# Altium PCB SolarCharger.PcbDoc
Units mm, origin at the board's own origin, x right, y up, seen from the top; angles counter-clockwise.
Board outline 72 x 45 mm, 2 copper layers (Top Layer, Bottom Layer); 84 components, 32 nets, 239 pads, 515 vias.
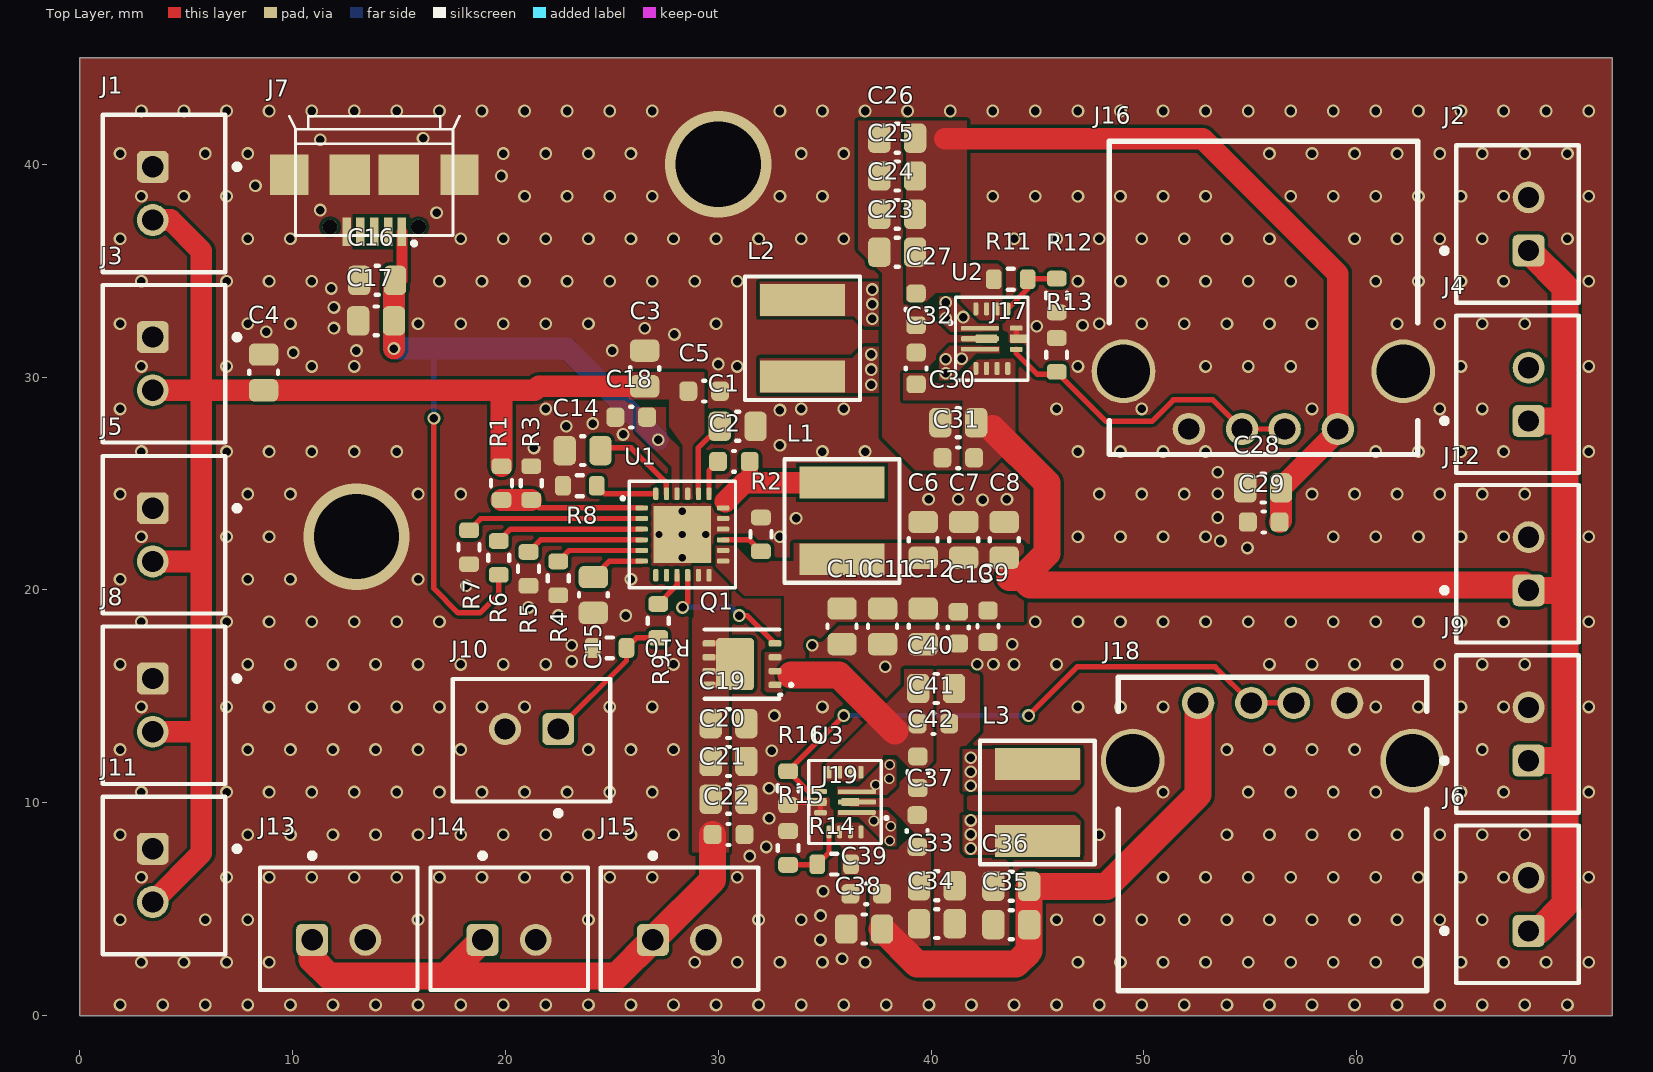
[diagram p0: Top Layer view]
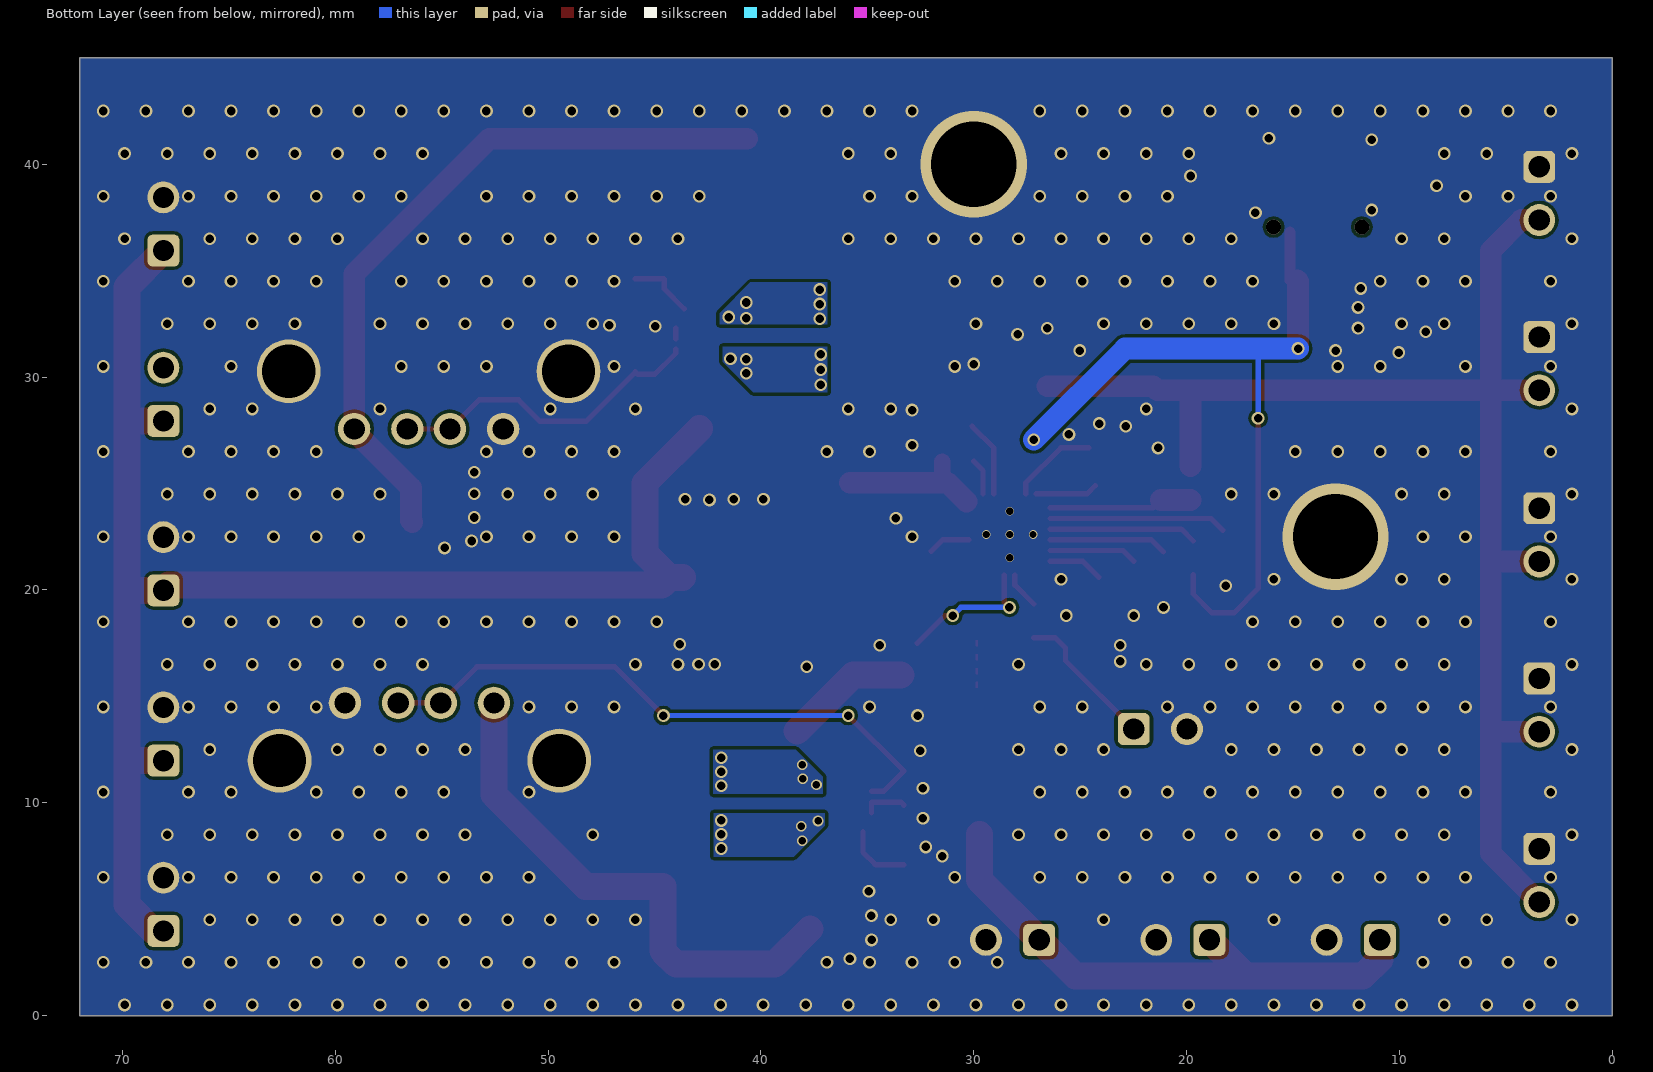
[diagram p1: Bottom Layer view, seen from below]
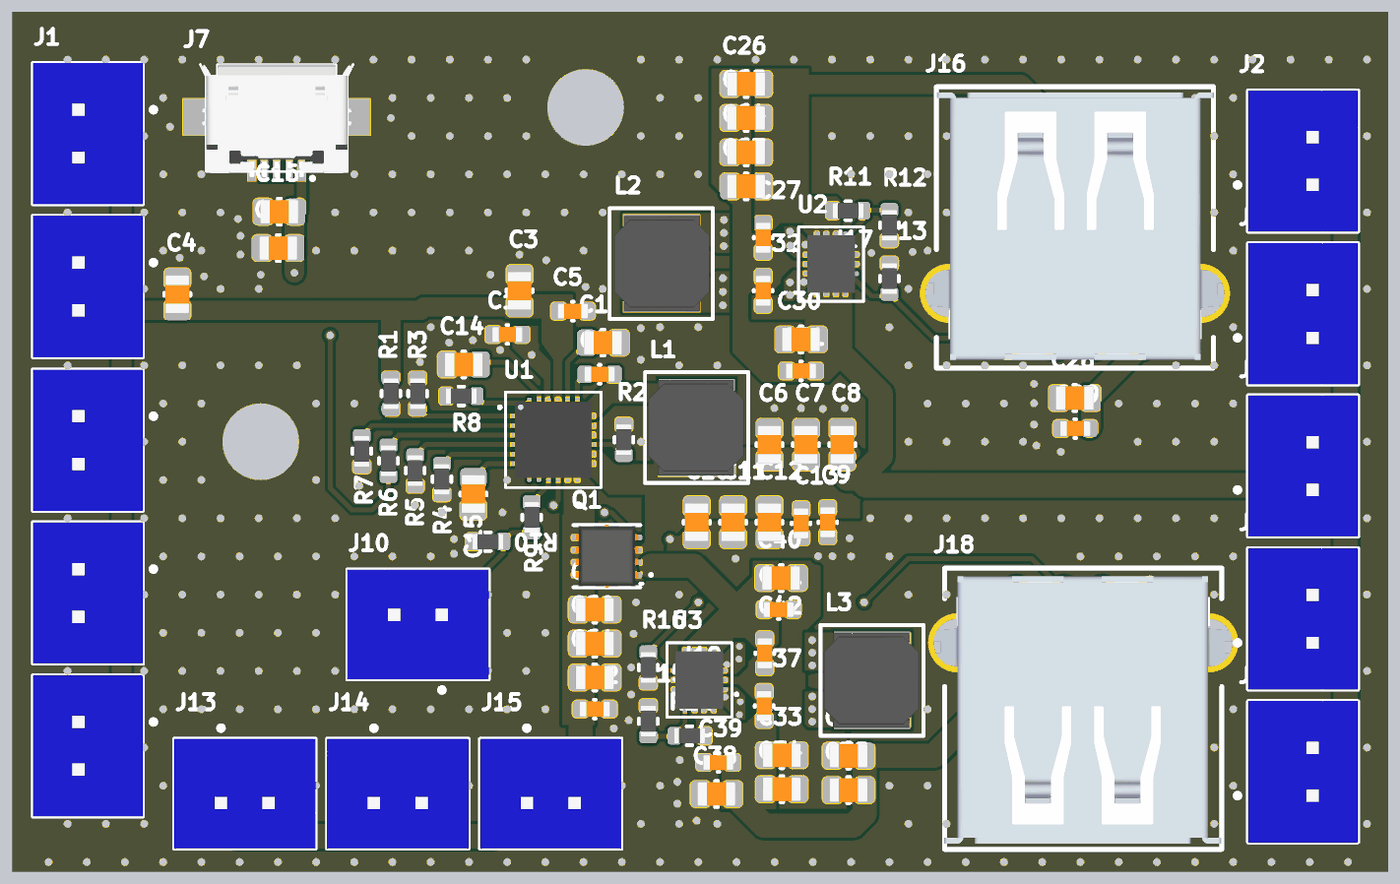
[diagram p2: 3D render of the assembled board from above, using the file's embedded part models]

## Layer stack, top to bottom
Top Solder: solder mask 0.0102, Solder Resist, Dk 3.5
Top Layer: signal copper 0.0356
Dielectric 1: dielectric 0.32, FR-4, Dk 4.8
Bottom Layer: signal copper 0.0356
Bottom Solder: solder mask 0.0102, Solder Resist, Dk 3.5

## Board outline
0,0 72,0 72,45 0,45

## Design rules (kind name [scope] priority, off if disabled: settings)
Clearance [All] p1: gap=0.15 ignorepadtopadclearanceinfootprint=FALSE except(0: Arc-Hole Track-Hole SMDPad-Hole THPad-Hole Via-Hole Fill-Hole Poly-Hole Region-Hole Text-Hole)
HoleSize [All] p1: absolutevalues=TRUE maxlimit=6.3 minlimit=0.2 maxpercent=80.000 minpercent=20.000
MinimumSolderMaskSliver [All] p1: minsoldermaskwidth=0.15
PlaneConnect [All] p1: planeconnectstyle=Direct reliefexpansion=0.508 reliefentries=4 reliefconductorwidth=0.254 reliefairgap=0.254
PolygonConnect [All] p1: connectstyle=Direct reliefconductorwidth=0.254 reliefentries=4 polygonreliefangle="90 Angle" airgapwidth=0.254
RoutingVias [All] p1: holewidth=0.6 width=0.35 viastyle="Through Hole" minholewidth=0.35 minwidth=0.3 maxholewidth=1.7 maxwidth=1.5
SilkToSilkClearance [All] p1: silktosilkclearance=0.15
SilkToSolderMaskClearance [IsPad] p1: minsilkscreentomaskgap=0.08 clearancetoexposedcopper=TRUE
SolderMaskExpansion [All] p1: expansion=0.045
Width [All] p1: maxlimit=1.524 minlimit=0.203 preferedwidth=0.254 minimp=50.000000 maximp=50.000000 favimp=50.000000
25 further rules are at their usual default settings.

## Classes and differential pairs
component class SolarCharger: C1 C2 C3 C4 C5 C6 C7 C8 C9 C14 C15 C16 C17 C18 C19 C20 C21 C22 C23 C24 C25 C26 C27 C28 C29 C30 C31 C32 C33 C34 C35 C36 C37 C38 C39 C40 J1 J2 J3 J4 J5 J6 J7 J8 J9 J10 J11 J12 J13 J14 J15 J16 J17 J18 J19 L1 L2 L3 Q1 R1 R2 R3 R4 R5 R6 R7 R8 R9 R10 R11 R12 R13 R14 R15 R16 U1 U2 U3

## Components (designator, comment, footprint, x,y, rotation, side; value= is the part's Value field where it differs from the comment)
C1 "4.7u" C0805_N 30.91,27.686 r180 top
C2 "10n" C0603_N 30.734,26.035 r0 top
C3 "10u" C0805_N 26.543,30.402 r90 top
C4 "10u" C0805_N 8.636,30.217 r90 top
C5 "100n" C0603_N 29.337,29.337 r0 top
C6 "10u" C0805_N 39.624,22.352 r90 top
C7 "10u" C0805_N 41.529,22.352 r90 top
C8 "10u" C0805_N 43.434,22.352 r90 top
C9 "100n" C0603_N 42.672,18.288 r270 top
C10 "10u" C0805_N 35.814,18.288 r270 top
C11 "10u" C0805_N 37.719,18.288 r270 top
C12 "10u" C0805_N 39.624,18.288 r270 top
C13 "100n" C0603_N 41.275,18.23 r270 top
C14 "4.7u" C0805_N 23.622,26.543 r0 top
C15 "4.7u" C0805_N 24.13,19.763 r270 top
C16 "10u" C0805_N 13.97,34.544 r180 top
C17 "10u" C0805_N 13.921,32.639 r180 top
C18 "100n" C0603_N 25.908,28.117 r180 top
C19 "10u" C0805_N 30.48,13.716 r0 top
C20 "10u" C0805_N 30.48,11.938 r0 top
C21 "10u" C0805_N 30.48,10.16 r0 top
C22 "100n" C0603_N 30.48,8.509 r0 top
C23 "10u" C0805_N 38.405,35.865 r180 top
C24 "10u" C0805_N 38.405,37.643 r180 top
C25 "10u" C0805_N 38.405,39.446 r180 top
C26 "10u" C0805_N 38.407,41.224 r180 top
C27 "100n" C0603_N 39.294,33.181 r270 top
C28 "10u" C0805_N 55.601,24.79 r180 top
C29 "100n" C0603_N 55.626,23.19 r180 top
C30 "CAP" C0805_N 41.275,27.856 r180 top
C31 "CAP" C0603_N 41.275,26.205 r180 top
C32 "CAP" C0603_N 39.294,30.404 r90 top
C33 "10u" C0805_N 40.267,6.096 r0 top
C34 "10u" C0805_N 40.267,4.318 r0 top
C35 "10u" C0805_N 43.764,4.267 r180 top
C36 "10u" C0805_N 43.764,6.071 r180 top
C37 "100n" C0603_N 39.345,8.669 r90 top
C38 "10u" C0805_N 36.854,4.064 r180 top
C39 "100n" C0603_N 36.949,5.715 r180 top
C40 "CAP" C0805_N 40.234,15.367 r0 top
C41 "CAP" C0603_N 40.107,13.716 r0 top
C42 "CAP" C0603_N 39.378,11.43 r270 top
J1 "=Value" B2B-XH-A 3.429,39.878 r270 top
J2 "=Value" B2B-XH-A 68.072,35.941 r90 top
J3 "=Value" B2B-XH-A 3.429,31.877 r270 top
J4 "=Value" B2B-XH-A 68.072,27.94 r90 top
J5 "=Value" B2B-XH-A 3.429,23.836 r270 top
J6 "=Value" B2B-XH-A 68.072,3.977 r90 top
J7 "USB_OTG" WR-COM-629105136821 12.686,39.497 r180 top
J8 "=Value" B2B-XH-A 3.429,15.835 r270 top
J9 "=Value" B2B-XH-A 68.072,11.978 r90 top
J10 "=Value" B2B-XH-A 22.479,13.462 r180 top
J11 "=Value" B2B-XH-A 3.429,7.834 r270 top
J12 "=Value" B2B-XH-A 68.072,19.979 r90 top
J13 "=Value" B2B-XH-A 10.918,3.556 r0 top
J14 "=Value" B2B-XH-A 18.923,3.556 r0 top
J15 "=Value" B2B-XH-A 26.924,3.556 r0 top
J16 "USB" USB_TYPE_A_SOCK 55.61,27.559 r180 top
J17 "2 way net tie junction" 2way_MP#1 43.358,31.801 r180 top net-tie
J18 "USB" USB_TYPE_A_SOCK 56.041,14.688 r0 top
J19 "2 way net tie junction" 2way_MP#2 35.441,10.033 r0 top net-tie
L1 "2u2" SNR5040 35.814,23.241 r270 top
L2 "IND" SNR5040 33.96,31.826 r90 top
L3 "IND" SNR5040 44.991,10.011 r270 top
Q1 "CSD25402" DNH8 31.115,16.51 r90 top
R1 "RES" R0603_N 19.812,25.019 r270 top
R2 "RES" R0603_N 32.004,22.606 r270 top
R3 "RES" R0603_N 21.209,25.019 r90 top
R4 "RES" R0603_N 22.479,20.541 r270 top
R5 "RES" R0603_N 21.082,20.988 r270 top
R6 "RES" R0603_N 19.685,21.502 r270 top
R7 "RES" R0603_N 18.288,22.004 r270 top
R8 "RES" R0603_N 23.495,24.892 r180 top
R9 "RES" R0603_N 27.178,18.542 r270 top
R10 "RES" R0603_N 24.892,17.272 r180 top
R11 "RES" R0603_N 43.739,34.595 r0 top
R12 "RES" R0603_N 45.898,33.833 r270 top
R13 "100k" R0603_N 45.898,31.039 r90 top
R14 "RES" R0603_N 35.441,7.112 r180 top
R15 "RES" R0603_N 33.282,7.874 r90 top
R16 "100k" R0603_N 33.282,10.685 r270 top
U1 "BQ24166" VQFN-24 28.313,22.602 r0 top
U2 "TPS630250" VQFN-HR-14 42.85,31.801 r0 top
U3 "TPS630250" VQFN-HR-14 35.953,10.03 r180 top

## Footprints (in the part's own frame and the unit in brackets; to place one, negate y for a bottom-side part, rotate by r counter-clockwise, add the part's x,y. Pads: shape width x height; smd on the part's side, far side on the other; paste and mask are expansions set on the pad)
2way_MP#1 [mil] "2 way medium power net tie junction"
  rrect5% 32x15 smd paste-100: 1(-30,0)
  rrect5% 39.37x15 smd paste-100: 2(30,0)
2way_MP#2 [mil] "2 way medium power net tie junction"
  rrect5% 32x15 smd paste-100: 1(-30,0) 2(30,0)
B2B-XH-A [mm] "Header, Vertical, 2.50 mm pitch; 0.70 mm lead width, 5 pins, 1 row, 5 pins per row, 14.90 mm L X 5.75 mm W X 7.00 mm H body"
  rrect33% 1.5x1.5 / inner round 1.5 / far side rrect33% 1.5x1.5 hole 1 paste-1.5: 1(0,0)
  round 1.5 hole 1 paste-1.5: 2(2.5,0)
  silkscreen extent -2.45,-2.35 4.95,4.08, body extent -2.45,-2.35 4.95,3.4, height 7.05
C0603_N [mm] "Capacitor, Chip; 1.60 mm L X 0.80 mm W X 0.87 mm H body"
  rrect50% 0.84x0.91 smd: 1(-0.745,0) 2(0.745,0)
  silkscreen extent -0.05,-0.49 0.05,0.49, body extent -0.8,-0.4 0.8,0.4, height 0.87
C0805_N [mm] "Capacitor, Chip; 2.00 mm L X 1.25 mm W X 1.35 mm H body"
  rrect48% 1.05x1.38 smd: 1(-0.84,0) 2(0.84,0)
  silkscreen extent -0.08,-0.68 0.08,0.68, body extent -1,-0.63 1,0.63, height 1.35
DNH8 [mm] "Small Outline No-Lead (SON with Tab), 0.65 mm pitch; 8 pin, 3.15 mm L X 3.30 mm W X 0.90 mm H body"
  rrect50% 0.3x0.6 smd: D(-0.975,-1.55) D(-0.325,-1.55) D(0.325,-1.55) G(0.975,-1.55) S(-0.975,1.55) S(-0.325,1.55) S(0.325,1.55) S(0.975,1.55)
  rrect18% 2.45x1.775 smd paste-2.45: S(0,0.33)
  Top Layer region: 0.825,1.2 1.125,1.2 1.125,1.325 0.825,1.325
  Top Layer region: 0.175,1.2 0.475,1.2 0.475,1.325 0.175,1.325
  Top Layer region: -0.475,1.2 -0.175,1.2 -0.175,1.325 -0.475,1.325
  Top Layer region: -1.125,1.2 -0.825,1.2 -0.825,1.325 -1.125,1.325
  silkscreen extent -1.63,-2.39 1.63,1.75, body extent -1.66,-1.65 1.65,1.65, height 0.9
R0603_N [mm] "Resistor, Chip; 1.60 mm L X 0.80 mm W X 0.55 mm H body"
  rrect51% 0.74x0.93 smd: 1(-0.795,0) 2(0.795,0)
  silkscreen extent -0.15,-0.49 0.15,0.49, body extent -0.8,-0.4 0.8,0.4, height 0.55
SNR5040 [mm] "2-Leads, Body 5.00x5.00mm"
  rect 1.5x4 smd: 1(-1.8,0) 2(1.8,0)
  silkscreen extent -2.9,-2.7 2.9,2.7, body extent -2.5,-2.54 2.5,2.46, height 4
USB_TYPE_A_SOCK [mm] "Usb type A socket, THT"
  round 1.524 hole 1: D_N(-1,0) D_P(1,0) GND(3.5,0) VBUS(-3.5,0)
  round 3 hole 2.5: S(-6.57,-2.71) S(6.57,-2.71)
  silkscreen extent -7.25,-13.52 7.25,1.2, body extent -8.02,-13.22 7.97,0.78, height 7.63
VQFN-24 [mm] "VQFN 24 pin, 4 mm L X 4 mm W X 1 mm H body"
  rrect50% 0.58x0.24 smd mask+0.07: 1(-1.913,1.25) 2(-1.913,0.75) 3(-1.913,0.25) 4(-1.913,-0.25) 5(-1.913,-0.75) 6(-1.913,-1.25) 13(1.913,-1.25) 14(1.913,-0.75) 15(1.913,-0.25) 16(1.913,0.25) 17(1.913,0.75) 18(1.913,1.25)
  rrect50% 0.24x0.58 smd mask+0.07: 7(-1.25,-1.913) 8(-0.75,-1.913) 9(-0.25,-1.913) 10(0.25,-1.913) 11(0.75,-1.913) 12(1.25,-1.913) 19(1.25,1.913) 20(0.75,1.913) 21(0.25,1.913) 22(-0.25,1.913) 23(-0.75,1.913) 24(-1.25,1.913)
  rect 2.7x2.7 smd mask+0.07: TH(0,0)
  silkscreen extent -2.87,-2.5 2.5,2.5, body extent -2.05,-2.05 6.2,2.05, height 1
VQFN-HR-14 [mm] "VQFN 14 pin, 3.1 mm L X 2.6 mm W X 0.90 mm H body"
  rrect50% 1.79x0.22 smd mask+0.05: 1(-0.555,0.49) 3(-0.555,-0.49)
  rrect50% 1.79x0.24 smd mask+0.05: 2(-0.555,0)
  rrect50% 0.24x0.6 smd mask+0.05: 4(-0.75,-1.4) 5(-0.25,-1.4) 6(0.25,-1.4) 7(0.75,-1.4) 11(0.75,1.4) 12(0.25,1.4) 13(-0.25,1.4) 14(-0.75,1.4)
  rrect50% 0.6x0.24 smd mask+0.05: 8(1.15,-0.5) 9(1.15,0) 10(1.15,0.5)
  silkscreen extent -2.02,-1.95 1.7,1.95, body extent -1.25,-1.5 1.25,1.5, height 1
WR-COM-629105136821 [mm] "5 pins"
  rect 0.4x1.35 smd: D_N(-1.8,2.675) D_P(-1.15,2.675) GND(0.15,2.675) ID(-0.5,2.675) VBUS(-2.45,2.675)
  rect 1.8x1.9 smd: S(-5.15,0) S(2.85,0)
  rect 1.9x1.9 smd: S(-2.3,0) S(0,0)
  round 0.7 hole 0.7 unplated: ""(-3.225,2.45) ""(0.925,2.45)
  silkscreen extent -5.15,-2.75 2.85,3.27, body extent -5.15,-2.76 2.85,3.15, height 2.69

## Part data
C1 C2 C3 C4 C5 C6 C7 C8 C9 C10 C11 C12 C13 C14 C15 C16 C17 C18 C19 C20 C21 C22 C23 C24 C25 C26 C27 C28 C29 C33 C34 C35 C36 C37 C38 C39: library part CAP, RevS="$Rev:: 58        $"
J1 J2 J3 J4 J5 J6 J8 J9 J10 J11 J12 J13 J14 J15: library part PINHDR_2X1, "Socket", ComponentLink1Description=Manufacturer, ComponentLink1URL=http://www.we-online.de, ComponentLink2Description=Datasheet, ComponentLink2URL=http://katalog.we-online.de/em/datasheet/691412320002.pdf
J7 J16 J18: "USB Connector, With Pegs, Micro USB Type B, USB 2.0, Receptacle, 5 Ways, Surface Mount, Right Angle"
J17 J19: library part NetTie_2, ComponentLink1Description=Source, ComponentLink1URL=http://www.edatools.cz/addons, FootprintNote="LP=12mil, MP=40mil, HP=120mil"
L1: library part IND, "Inductor"
L2 L3: "Inductor"
Q1: library part MOSFET_P
R13 R16: library part RES
U1: "2.5A, Dual-Input, Single Cell Switch Mode Li-Ion Battery Charger with Power Path / Management"
U2 U3: library part TPS63025, "High Current, High Efficiency Single Inductor Buck-Boost Converter"
C30 C31 C32 C40 C41 C42: RevS="$Rev:: 58        $"

## Via types
v1: diameter 0.6, hole 0.4, Top Layer to Bottom Layer, tented both sides, 502 vias
v2: diameter 0.5, hole 0.35, Top Layer to Bottom Layer, tented both sides, 6 vias
v3: diameter 0.4, hole 0.35, Top Layer to Bottom Layer, tented both sides, 5 vias
v4: diameter 5, hole 4, Top Layer to Bottom Layer, tented both sides, 2 vias

## Nets (pads, with @x,y where several pads share a name; then routed paths per layer and width w, separated by ;. In a path a pad name is that pad's centre, name@x,y a point inside that pad or via, vN(x,y) a via of type N, cw(c..) or ccw(c..) an arc to the next point about the centre after c; other vN are vias at no path point)
GND: C1.1 C3.2 C4.2 C5.2 C6.2 C7.2 C8.2 C9.2 C10.2 C11.2 C12.2 C13.2 C14.1 C15.2 C16.2 C17.2 C18.2 C19.2 C20.2 C21.2 C22.2 C28.2 C29.2 C38.2 C39.2 J1.1 J2.2 J3.1 J5.1 J6.2 J7.GND J7.S J8.1 J9.2 J10.2 J11.1 J12.2 J13.2 J14.2 J15.2 J16.GND J16.S J17.1 J18.GND J18.S J19.1 R2.1 R3.2 R4.2 R5.2 R7.2 R8.2 R10.2 R12.2 R13.2 R15.2 R16.2 U1.16 U1.17 U1.TH U2.9 U2.10 U3.9 U3.10 | length 2.6
  Top Layer w0.254: R16.2 33.422,10.03 U3.9 U3.10 ; U2.9 U2.10
  other v1: 1.895,0.5 3.895,0.5 5.895,0.5 7.895,0.5 9.895,0.5 11.895,0.5 13.895,0.5 15.895,0.5 17.895,0.5 19.895,0.5 21.895,0.5 23.895,0.5 25.895,0.5 27.895,0.5 29.895,0.5 31.895,0.5 33.895,0.5 35.895,0.5 37.895,0.5 39.895,0.5 41.895,0.5 43.895,0.5 45.895,0.5 47.895,0.5 49.895,0.5 51.895,0.5 53.895,0.5 55.895,0.5 57.895,0.5 59.895,0.5 61.895,0.5 63.895,0.5 65.895,0.5 67.895,0.5 69.895,0.5 2.895,2.5 4.895,2.5 6.895,2.5 8.895,2.5 28.895,2.5 30.895,2.5 32.895,2.5 34.895,2.5 36.895,2.5 46.895,2.5 48.895,2.5 50.895,2.5 52.895,2.5 54.895,2.5 56.895,2.5 58.895,2.5 60.895,2.5 62.895,2.5 64.895,2.5 66.895,2.5 68.895,2.5 70.895,2.5 35.814,2.667 34.798,3.556 1.895,4.5 5.895,4.5 7.895,4.5 15.895,4.5 23.895,4.5 31.895,4.5 33.895,4.5 45.895,4.5 47.895,4.5 49.895,4.5 51.895,4.5 53.895,4.5 55.895,4.5 57.895,4.5 59.895,4.5 61.895,4.5 63.895,4.5 65.895,4.5 34.803,4.699 34.925,5.842 2.895,6.5 6.895,6.5 8.895,6.5 10.895,6.5 12.895,6.5 14.895,6.5 16.895,6.5 18.895,6.5 20.895,6.5 22.895,6.5 24.895,6.5 26.895,6.5 30.895,6.5 50.895,6.5 52.895,6.5 54.895,6.5 56.895,6.5 58.895,6.5 60.895,6.5 62.895,6.5 64.895,6.5 66.895,6.5 70.895,6.5 31.479,7.493 32.258,7.924 1.895,8.5 7.895,8.5 9.895,8.5 11.895,8.5 13.895,8.5 15.895,8.5 17.895,8.5 19.895,8.5 21.895,8.5 23.895,8.5 25.895,8.5 27.895,8.5 47.895,8.5 53.895,8.5 55.895,8.5 57.895,8.5 59.895,8.5 61.895,8.5 63.895,8.5 65.895,8.5 67.895,8.5 32.385,9.271 2.895,10.5 6.895,10.5 8.895,10.5 10.895,10.5 12.895,10.5 14.895,10.5 16.895,10.5 18.895,10.5 20.895,10.5 22.895,10.5 24.895,10.5 26.895,10.5 50.895,10.5 54.895,10.5 56.895,10.5 58.895,10.5 60.895,10.5 64.895,10.5 66.895,10.5 70.895,10.5 32.385,10.685 32.512,12.446 1.895,12.5 7.895,12.5 9.895,12.5 11.895,12.5 13.895,12.5 15.895,12.5 17.895,12.5 23.895,12.5 25.895,12.5 27.895,12.5 53.895,12.5 55.895,12.5 57.895,12.5 59.895,12.5 65.895,12.5 32.639,14.097 2.895,14.5 6.895,14.5 8.895,14.5 10.895,14.5 12.895,14.5 14.895,14.5 16.895,14.5 18.895,14.5 20.895,14.5 24.895,14.5 26.895,14.5 34.895,14.5 46.895,14.5 48.895,14.5 50.895,14.5 60.895,14.5 62.895,14.5 64.895,14.5 66.895,14.5 70.895,14.5 37.846,16.383 1.895,16.5 7.895,16.5 9.895,16.5 11.895,16.5 13.895,16.5 15.895,16.5 17.895,16.5 19.895,16.5 21.895,16.5 27.895,16.5 42.164,16.51 42.924,16.51 43.895,16.5 45.895,16.5 55.895,16.5 57.895,16.5 59.895,16.5 61.895,16.5 63.895,16.5 65.895,16.5 67.895,16.5 23.114,16.637 23.114,17.399 34.417,17.399 43.815,17.448 2.895,18.5 6.895,18.5 8.895,18.5 10.895,18.5 12.895,18.5 14.895,18.5 16.895,18.5 44.895,18.5 46.895,18.5 48.895,18.5 50.895,18.5 52.895,18.5 54.895,18.5 56.895,18.5 58.895,18.5 60.895,18.5 62.895,18.5 64.895,18.5 66.895,18.5 70.895,18.5 22.479,18.796 25.654,18.796 21.082,19.177 18.161,20.193 1.895,20.5 7.895,20.5 9.895,20.5 15.895,20.5 25.895,20.5 54.864,21.971 53.594,22.297 2.895,22.5 6.895,22.5 8.895,22.5 32.895,22.5 46.895,22.5 48.895,22.5 50.895,22.5 52.895,22.5 58.895,22.5 60.895,22.5 62.895,22.5 64.895,22.5 66.895,22.5 70.895,22.5 33.655,23.368 53.467,23.401 42.418,24.224 39.878,24.257 41.275,24.257 43.561,24.257 1.895,24.5 7.895,24.5 9.895,24.5 15.895,24.5 17.895,24.5 47.895,24.5 49.895,24.5 51.895,24.5 53.467,24.515 57.895,24.5 59.895,24.5 61.895,24.5 63.895,24.5 65.895,24.5 67.895,24.5 53.467,25.527 2.895,26.5 6.895,26.5 8.895,26.5 10.895,26.5 12.895,26.5 14.895,26.5 34.895,26.5 36.895,26.5 46.895,26.5 48.895,26.5 50.895,26.5 52.895,26.5 60.895,26.5 62.895,26.5 64.895,26.5 66.895,26.5 70.895,26.5 21.336,26.67 32.893,26.797 25.527,27.305 22.86,27.686 24.097,27.813 32.893,28.448 1.895,28.5 21.895,28.5 33.895,28.5 35.895,28.5 45.895,28.5 49.895,28.5 57.895,28.5 63.895,28.5 65.895,28.5 2.895,30.5 6.895,30.5 10.895,30.5 12.895,30.5 30.895,30.5 46.895,30.5 52.895,30.5 54.895,30.5 56.895,30.5 64.895,30.5 70.895,30.5 30,30.607 10.033,31.149 13,31.242 25.019,31.242 27.94,32.004 8.763,32.131 26.543,32.291 11.938,32.301 44.958,32.385 47.117,32.436 1.895,32.5 7.895,32.5 9.895,32.5 15.895,32.5 17.895,32.5 19.895,32.5 21.895,32.5 23.895,32.5 29.895,32.5 47.895,32.5 49.895,32.5 51.895,32.5 53.895,32.5 55.895,32.5 57.895,32.5 61.895,32.5 63.895,32.5 65.895,32.5 67.895,32.5 11.938,33.274 11.811,34.163 2.895,34.5 6.895,34.5 8.895,34.5 10.895,34.5 16.895,34.5 18.895,34.5 20.895,34.5 22.895,34.5 24.895,34.5 26.895,34.5 28.895,34.5 30.895,34.5 46.895,34.5 48.895,34.5 50.895,34.5 52.895,34.5 54.895,34.5 56.895,34.5 60.895,34.5 62.895,34.5 64.895,34.5 66.895,34.5 70.895,34.5 1.895,36.5 7.895,36.5 9.895,36.5 17.895,36.5 19.895,36.5 21.895,36.5 23.895,36.5 25.895,36.5 27.895,36.5 29.895,36.5 31.895,36.5 33.895,36.5 35.895,36.5 43.895,36.5 45.895,36.5 47.895,36.5 49.895,36.5 51.895,36.5 53.895,36.5 55.895,36.5 59.895,36.5 61.895,36.5 63.895,36.5 65.895,36.5 69.895,36.5 16.764,37.719 11.303,37.846 2.895,38.5 4.895,38.5 6.895,38.5 20.895,38.5 22.895,38.5 24.895,38.5 26.895,38.5 32.895,38.5 34.895,38.5 42.895,38.5 44.895,38.5 46.895,38.5 48.895,38.5 50.895,38.5 52.895,38.5 56.895,38.5 58.895,38.5 60.895,38.5 62.895,38.5 64.895,38.5 66.895,38.5 70.895,38.5 8.255,38.989 19.812,39.446 1.895,40.5 5.895,40.5 7.895,40.5 19.895,40.5 21.895,40.5 23.895,40.5 25.895,40.5 33.895,40.5 35.895,40.5 55.895,40.5 57.895,40.5 59.895,40.5 61.895,40.5 63.895,40.5 65.895,40.5 67.895,40.5 69.895,40.5 11.303,41.148 16.129,41.224 2.895,42.5 4.895,42.5 6.895,42.5 8.895,42.5 10.895,42.5 12.895,42.5 14.895,42.5 16.895,42.5 18.895,42.5 20.895,42.5 22.895,42.5 24.895,42.5 26.895,42.5 32.895,42.5 34.895,42.5 36.895,42.5 38.895,42.5 40.895,42.5 42.895,42.5 44.895,42.5 46.895,42.5 48.895,42.5 50.895,42.5 52.895,42.5 54.895,42.5 56.895,42.5 58.895,42.5 60.895,42.5 62.895,42.5 64.895,42.5 66.895,42.5 68.895,42.5 70.895,42.5
  other v3: 28.313,21.502 27.213,22.602 28.313,22.602 29.413,22.602 28.313,23.702
  other v4: 13,22.5 30,40
NetC1_2: C1.2 U1.20 | length 3.6
  Top Layer w0.254: U1.20 29.063,26.679 C1.2
NetC2_1: C2.1 U1.19 | length 1.7
  Top Layer w0.254: U1.19 29.563,25.609 C2.1
NetC2_2: C2.2 L1.1 U1.18 | length 8.2
  Top Layer w0.762: 30.226,24.155 31.479,25.408 C2.2
  Top Layer w1.016: 30.341,24.155 31.227,25.041 L1.1
NetC14_2: C14.2 U1.23 | length 4.2
  Top Layer w0.254: C14.2@24.589,26.67 25.908,26.67 27.563,25.015 U1.23
NetC15_1: C15.1 U1.6 | length 2.6
  Top Layer w0.254: C15.1 24.879,21.352 U1.6
NetJ10_1: J10.1 R9.2 R10.1 | length 6.8
  Top Layer w0.254: J10.1 25.687,16.67 R10.1 26.162,17.747 R9.2
NetJ16_D_N: J16.D_N J16.D_P R13.1 U2.8 | length 15.2
  Top Layer w0.254: U2.8 44,31.114 44.988,30.125 45.779,30.125 R13.1 48.227,27.915 50.368,27.915 51.384,28.931 53.238,28.931 J16.D_P J16.D_N
NetJ18_D_N: J18.D_N J18.D_P R16.1 U3.8 | length 28.4
  Top Layer w0.254: U3.8 34.232,10.53 R16.1 v1(35.899,14.097) ; v1(44.577,14.097) 46.863,16.383 53.346,16.383 J18.D_N J18.D_P
  Bottom Layer w0.254: v1(35.899,14.097) v1(44.577,14.097)
NetL2_1: L2.1 U2.3
  other v1: 37.186,29.642 40.691,30.175 37.186,30.353 40.691,30.836 41.427,30.861 37.186,31.064
NetL2_2: L2.2 U2.1
  other v1: 37.236,32.741 40.691,32.766 41.504,32.817 37.236,33.426 40.691,33.503 37.236,34.112
NetL3_1: L3.1 U3.3
  other v1: 41.859,10.795 41.859,11.455 41.859,12.116
  other v2: 37.389,10.846 38.024,11.125 38.049,11.786
NetL3_2: L3.2 U3.1
  other v1: 41.859,7.849 41.859,8.509 41.859,9.169
  other v2: 38.049,8.211 38.1,8.89 37.313,9.144
NetQ1_G: Q1.G U1.10 | length 6.7
  Top Layer w0.254: v1(28.321,19.177) 28.563,19.419 U1.10 ; v1(30.988,18.796) 31.354,18.796 Q1.G
  Bottom Layer w0.254: v1(28.321,19.177) 30.607,19.177 v1(30.988,18.796)
NetR1_2: R1.2 R3.1 U1.1 | length 6.7
  Top Layer w0.254: R3.1 21.581,23.852 U1.1
  Top Layer w1.016: R1.2 R3.1
NetR2_2: R2.2 U1.15 | length 2
  Top Layer w0.254: U1.15 31.463,22.352 R2.2
NetR4_1: R4.1 U1.5 | length 4.1
  Top Layer w0.254: R4.1 22.995,21.852 U1.5
NetR5_1: R5.1 U1.4 | length 5.6
  Top Layer w0.254: R5.1 21.651,22.352 U1.4
NetR6_1: R6.1 U1.3 | length 6.9
  Top Layer w0.254: R6.1 20.24,22.852 U1.3
NetR7_1: R7.1 U1.2 | length 8.3
  Top Layer w0.254: R7.1 18.841,23.352 U1.2
NetR8_1: R8.1 U1.24 | length 2.9
  Top Layer w0.254: R8.1 24.667,24.515 U1.24
NetR9_1: R9.1 U1.9 | length 1.7
  Top Layer w0.254: R9.1 28.063,20.222 U1.9
NetR11_2: R11.2 R12.1 U2.11 | length 3.2
  Top Layer w0.254: U2.11 44.534,34.135 R11.2 44.567,34.628 R12.1
NetR14_2: R14.2 R15.1 U3.11 | length 3.1
  Top Layer w0.254: R15.1 34.613,7.079 R14.2 35.203,7.669 U3.11
PGND_5V_1: C23.2 C24.2 C25.2 C26.2 C27.2 C30.2 C31.2 C32.2 J17.2 U2.2
PGND_5V_2: C33.2 C34.2 C35.2 C36.2 C37.2 C40.2 C41.2 C42.2 J19.2 U3.2
Vbat: C19.1 C20.1 C21.1 C22.1 J13.1 J14.1 J15.1 Q1.S U1.11 U1.12 | length 26.5
  Top Layer w1.27: J13.1 10.918,2.646 11.709,1.854 17.221,1.854 ; J14.1 17.221,1.854 ; C22.1 29.735,6.367 J15.1 25.222,1.854 17.221,1.854
Vin: C3.1 C4.1 C5.1 J1.2 J3.2 J5.2 J8.2 J11.2 R1.1 U1.21 | length 65.8
  Top Layer w1.016: J11.2 5.715,7.62 5.715,13.335 ; J8.2 5.715,13.335 ; J5.2 5.715,21.336 ; J3.2 5.675,29.377 5.715,29.337 ; J1.2 4.278,37.378 5.715,35.941 5.715,29.337 ; R1.1 19.812,29.25 19.939,29.377 ; C3.1 21.561,29.562 21.376,29.377 19.939,29.377 ; 5.715,13.335 5.715,21.336 ; 5.715,21.336 5.715,29.337 ; 5.715,29.337 5.755,29.377 C4.1 19.939,29.377
Vsys: C6.1 C7.1 C8.1 C9.1 C10.1 C11.1 C12.1 C13.1 C30.1 C31.1 C32.1 C40.1 C41.1 C42.1 J2.1 J4.1 J6.1 J9.1 J12.1 L1.2 Q1.D U1.13 U1.14 U2.4 U2.5 U2.6 U2.7 U3.4 U3.5 U3.6 U3.7 | length 78
  Top Layer w1.27: 33.426,16.002 35.662,16.002 38.303,13.36 ; 42.875,27.584 45.441,25.019 45.441,21.717 44.298,20.574 ; 43.688,20.574 44.298,20.574 ; J6.1 68.544,3.977 69.774,5.207 69.774,11.887 ; J9.1 69.683,11.978 69.774,11.887 ; J4.1 69.698,27.94 69.774,28.016 ; J2.1 69.774,34.239 69.774,28.016 ; 44.298,20.574 44.653,20.218 67.833,20.218 J12.1 69.708,19.979 69.774,19.914 ; 69.774,11.887 69.774,19.914 ; 69.774,19.914 69.774,28.016
Vusb: C16.1 C17.1 C18.1 J7.VBUS R6.2 U1.22 | length 35.8
  Top Layer w0.254: v1(16.637,28.067) 16.637,20.066 17.78,18.923 18.796,18.923 19.685,19.812 R6.2
  Top Layer w0.508: C16.1@15.136,34.544 J7.VBUS
  Top Layer w1.016: v1(14.761,31.34) C17.1 14.761,34.495 C16.1
  Bottom Layer w0.254: v1(16.637,28.067) 16.637,31.34
  Bottom Layer w1.016: v1(14.761,31.34) 16.637,31.34 22.889,31.34 v1(27.178,27.051)
Vusb1: C23.1 C24.1 C25.1 C26.1 C27.1 C28.1 C29.1 J16.VBUS R11.1 U2.12 U2.13 U2.14 | length 33.9
  Top Layer w1.016: 40.64,41.199 52.756,41.199 59.11,34.845 J16.VBUS 59.11,27.46 C28.1 56.441,23.26 C29.1
Vusb2: C33.1 C34.1 C35.1 C36.1 C37.1 C38.1 C39.1 J18.VBUS R14.1 U3.12 U3.13 U3.14 | length 24.9
  Top Layer w1.27: C38.1 39.345,2.413 43.993,2.413 44.604,3.024 C35.1 C36.1 48.235,6.071 52.541,10.377 J18.VBUS
pads on no net: J4.2 J7. J7.D_N J7.D_P J7.ID U1.7 U1.8

## Polygon pours and split planes (outlines as drawn)
GND on Top Layer "Top_GND" (solid, pour order 54): 0,0 72,0 72,45 0,45
Vsys on Top Layer "Top Layer-Vsys" (solid, pour order 50): 44.348,22.073 44.348,18.491 35.585,18.491 34.087,16.993 34.087,15.189 32.283,15.189 32.156,15.316 32.182,15.342 32.182,17.069 32.918,17.069 33.096,17.247 33.096,19.736 31.217,19.736 29.87,21.082 29.87,22.073 30.801,22.073 31.537,21.336 33.553,21.336 33.553,22.2 44.272,22.2 44.272,22.149
Vbat on Top Layer "Top Layer-Vbat" (solid, pour order 52): 28.854,21.107 29.718,21.107 30.48,20.345 30.48,7.671 28.778,7.671 28.778,18.644 28.854,18.72
NetL2_2 on Top Layer "Top Layer-NetL2_2" (solid, pour order 44): 31.953,32.842 31.979,32.868 36.373,32.868 36.855,32.385 37.592,32.385 37.592,34.468 31.953,34.468
NetL2_1 on Top Layer "Top Layer-NetL2_1" (solid, pour order 42): 31.953,29.261 31.953,30.886 36.297,30.886 36.83,31.42 37.668,31.42 37.668,29.261
PGND_5V_1 on Top Layer "Top Layer-PGND_5V_1" (solid, pour order 40): 42.57,31.547 40.945,31.547 39.573,30.175 38.684,30.175 38.684,28.905 41.481,28.905 41.481,25.629 39.243,25.629 37.694,27.178 37.694,34.874 36.576,35.992 36.576,42.037 38.684,42.037 38.684,33.401 39.522,33.401 40.945,31.979 42.57,31.979
Vusb1 on Top Layer "Top Layer-Vusb1" (solid, pour order 34): 43.332,32.664 43.332,35.128 43.129,35.331 41.681,35.331 41.681,42.037 38.837,42.037 38.837,33.553 39.802,33.553 40.208,33.96 41.402,33.96 41.402,33.553 42.291,32.664
Vsys on Top Layer "Top Layer-Vsys 1" (solid, pour order 32): 43.942,30.886 42.16,30.806 41.097,29.718 40.081,29.718 40.081,30.175 38.684,30.175 38.684,28.905 41.481,28.905 41.481,25.629 42.697,25.629 43.942,26.873
NetL2_1 on Top Layer "Top Layer-NetL2_1 1" (solid, pour order 30): 43.231,31.471 40.869,31.471 40.386,30.988 40.386,29.845 40.843,29.845 42.113,31.115 43.231,31.115
NetL2_2 on Top Layer "Top Layer-NetL2_2 1" (solid, pour order 26): 43.18,32.131 40.919,32.131 40.386,32.664 40.386,33.782 40.945,33.782 42.215,32.512 43.18,32.512
PGND_5V_2 on Top Layer "Top Layer-PGND_5V_2" (solid, pour order 24): 36.203,9.779 38.049,9.779 39.472,8.357 39.98,8.357 39.98,3.277 40.005,3.302 43.663,3.302 43.663,7.163 43.383,7.442 41.504,7.442 41.504,12.573 42.291,13.36 42.291,16.281 40.107,16.281 40.107,11.938 39.776,11.608 38.989,11.608 38.989,11.43 37.922,10.363 37.922,10.287 37.871,10.236 36.203,10.236
Vsys on Top Layer "Top Layer-Vsys 2" (solid, pour order 20): 36.855,10.998 35.001,10.998 35.001,11.76 38.735,15.494 38.735,16.281 40.107,16.281 40.107,11.938 39.776,11.608 38.989,11.608 38.354,12.243 37.719,12.243 37.719,11.862
Vusb2 on Top Layer "Top Layer-Vusb2" (solid, pour order 18): 36.855,9.068 35.56,9.068 35.458,8.966 35.458,8.23 35.789,7.899 35.789,6.604 36.652,6.604 37.109,6.147 37.109,3.277 39.98,3.277 39.98,8.357 38.964,8.357 38.557,7.95 37.973,7.95
NetL3_2 on Top Layer "Top Layer-NetL3_2" (solid, pour order 12): 47.041,9.119 46.745,9.414 41.488,9.414 41.478,9.423 41.478,7.722 41.656,7.544 47.041,7.544
NetL3_1 on Top Layer "Top Layer-NetL3_1" (solid, pour order 10): 47.041,10.897 47.041,12.522 41.478,12.522 41.478,10.541 46.685,10.541
NetL3_1 on Top Layer "Top Layer-NetL3_1 1" (solid, pour order 8): 35.585,10.363 37.922,10.363 38.354,10.795 38.354,12.04 37.897,12.04 36.601,10.744 35.585,10.744
NetL3_2 on Top Layer "Top Layer-NetL3_2 1" (solid, pour order 6): 35.585,9.652 37.922,9.652 38.354,9.22 38.354,7.95 37.973,7.95 36.576,9.347 35.585,9.347
Vusb on Top Layer "Top Layer-Vusb" (solid, pour order 2): 28.321,24.224 27.813,24.224 27.813,25.781 26.162,27.432 26.162,28.575 27.563,28.575 27.559,28.571 27.559,27.297 28.313,26.543
Vin on Top Layer "Top Layer-Vin" (solid, pour order 0): 28.321,24.224 28.829,24.224 28.829,26.797 29.337,27.305 29.337,30.226 25.781,30.226 25.781,28.956 27.686,28.956 27.686,27.686 28.321,26.797
GND on Bottom Layer "Bottom_GND" (solid, pour order 55): 0,0 72,0 72,45 0,45
NetL2_1 on Bottom Layer "Bottom Layer-NetL2_1" (solid, pour order 48): 36.881,31.42 41.783,31.42 41.783,30.709 40.361,29.286 36.881,29.286
NetL2_2 on Bottom Layer "Bottom Layer-NetL2_2" (solid, pour order 46): 36.881,34.442 40.488,34.442 41.935,32.995 41.935,32.487 36.881,32.487
NetL3_1 on Bottom Layer "Bottom Layer-NetL3_1" (solid, pour order 16): 42.24,12.497 42.24,10.414 37.084,10.414 37.084,11.227 38.354,12.497
NetL3_2 on Bottom Layer "Bottom Layer-NetL3_2" (solid, pour order 14): 42.215,7.468 42.215,9.5 37.008,9.5 37.008,8.915 38.456,7.468
no net on Mechanical 1 (solid): 72,0

## Silkscreen, mask and mechanical layers (free items; w line width, h text height)
Mechanical 1:
  the board outline again, w0.254